# Allegro board LAB12-t25-4.brd
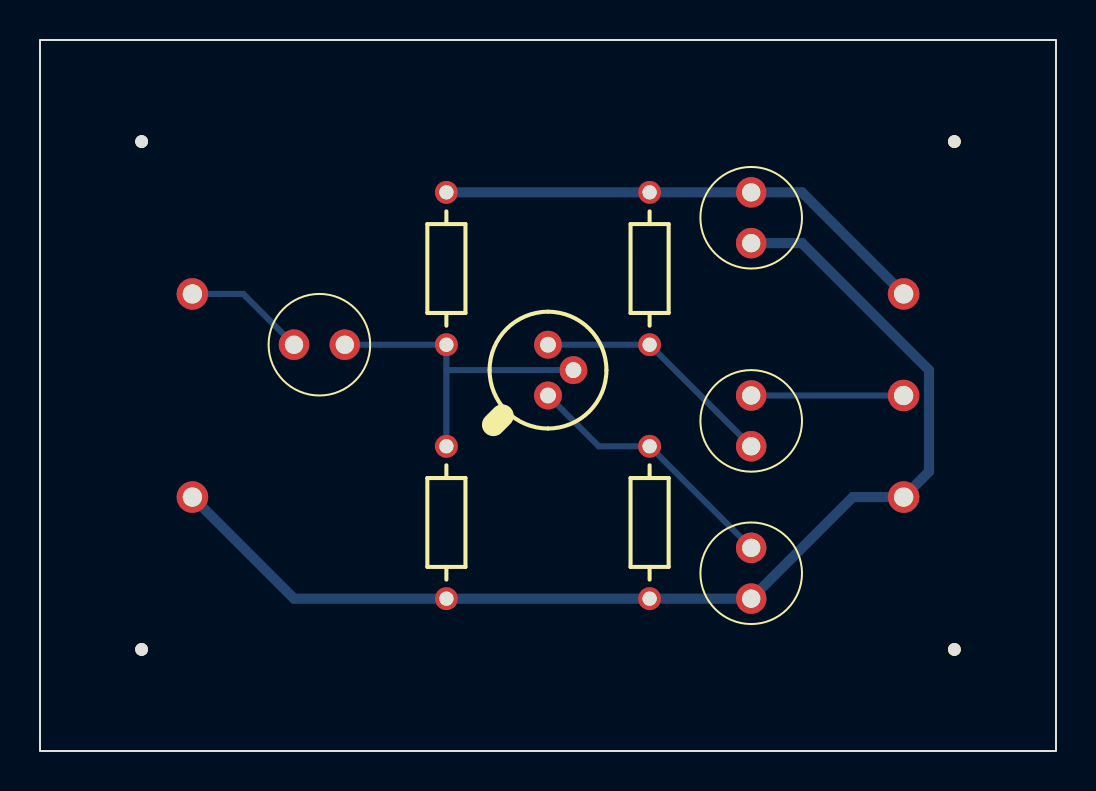
[diagram p0: board, top side]
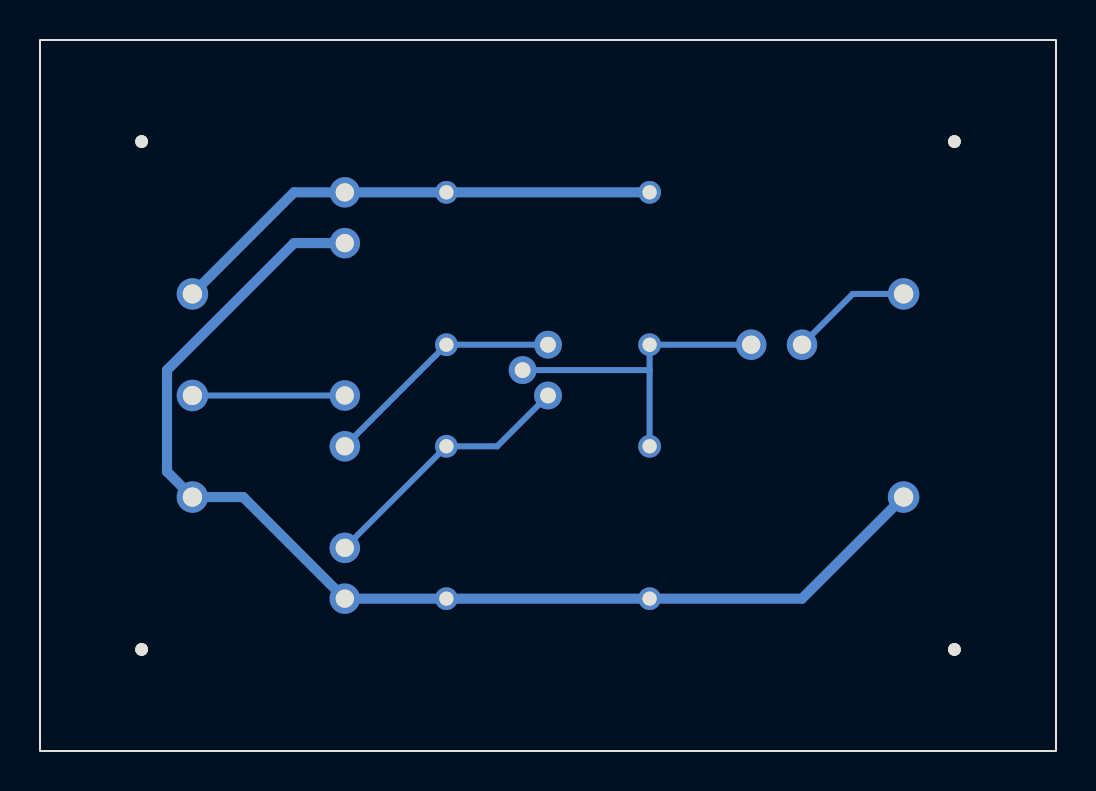
[diagram p1: board, bottom side, seen from below]

Outline 50.8 x 35.56 mm; copper layers: TOP, BOTTOM. Coordinates in mm from the lower left corner of the outline.
Outline path: rectangle 0,0 50.8,35.56

## Design rules (mm)
constraint set DEFAULT: min track width 0.127

## Placement (name value [footprint] x y rotation side)
C1  10uF  [CAP196]  15.24 20.32 90 top
C2  10uF  [CAP196]  35.56 15.24 0 top
C3  220uF  [CAP196]  35.56 10.16 180 top
C4  10uF  [CAP196]  35.56 27.94 180 top
J1  CON1  [TESTCOUP]  7.62 22.86 0 top
J2  CON1  [TESTCOUP]  7.62 12.7 0 top
J3  CON1  [TESTCOUP]  43.18 22.86 0 top
J4  CON1  [TESTCOUP]  43.18 17.78 0 top
J5  CON1  [TESTCOUP]  43.18 12.7 0 top
NOREF  -  [unnamed]  45.72 5.08 0 top
NOREF#2  -  [unnamed]  5.08 5.08 0 top
NOREF#3  -  [unnamed]  45.72 30.48 0 top
NOREF#4  -  [unnamed]  5.08 30.48 0 top
Q1  Q2N2222  [TO18]  25.4 17.78 90 top
R2  100k  [AXRC05]  20.32 20.32 90 top
R3  12k  [AXRC05]  20.32 7.62 90 top
R4  5k  [AXRC05]  30.48 20.32 90 top
R5  470  [AXRC05]  30.48 7.62 90 top

## Library data of the parts
C1-C4 = C_elect_0: Tolerance: ***; User Part Number: ***
J1-J5 = CON1
Q1 = Q2N2222
R2-R5 = R

## Footprints (pads in the part's own frame, mm; a bottom-side part is the same pattern mirrored in y, then rotated)
AXRC05
  round 1.143 hole 0.711: 1(0,0) 2(7.62,0)
CAP196
  round 1.524 hole 0.914: 1(0,0) 2(0,2.54)
TESTCOUP
  round 1.575 hole 0.965: 1(0,0)
TO18
  round 1.397 hole 0.787: 1(0,0) 2(1.27,-1.27) 3(2.54,0)
unnamed
  round 0.635 hole 3.175 unplated: (0,0)

## Nets
0: C3.2(-) C4.2(-) J2.1 J5.1 R3.1 R5.1
B: C1.1 Q1.2 R2.1 R3.2
C: C2.1 Q1.3 R4.1
E: C3.1 Q1.1(E) R5.2
IN: C1.2(-) J1.1
OUT: C2.2(-) J4.1
N01969: C4.1 J3.1 R2.2 R4.2

## Routing (per net, layer and track width the routed paths; a pad name or vN(x,y) marks a point on that pad's centre or on a via; arc(x,y) is an arc through that point)
0: length 58.2
  BOTTOM w0.508: J2.1 12.7,7.62 R3.1 R5.1 C3.2 40.64,12.7 J5.1 44.45,13.97 44.45,19.05 38.1,25.4 C4.2
B: length 16.5
  BOTTOM w0.305: 20.32,19.05 R3.2 ; 20.32,19.05 R2.1 C1.1 ; 20.32,19.05 Q1.2
C: length 12.3
  BOTTOM w0.305: C2.1 R4.1 Q1.3
E: length 13.3
  BOTTOM w0.305: Q1.1 27.94,15.24 R5.2 C3.1
IN: length 6.1
  BOTTOM w0.305: C1.2 10.16,22.86 J1.1
OUT: length 7.6
  BOTTOM w0.305: C2.2 J4.1
N01969: length 25
  BOTTOM w0.508: R2.2 R4.2 C4.1 38.1,27.94 J3.1
